# EAGLE board FIDO2AUTH_001 (EAGLE 7.7.0)
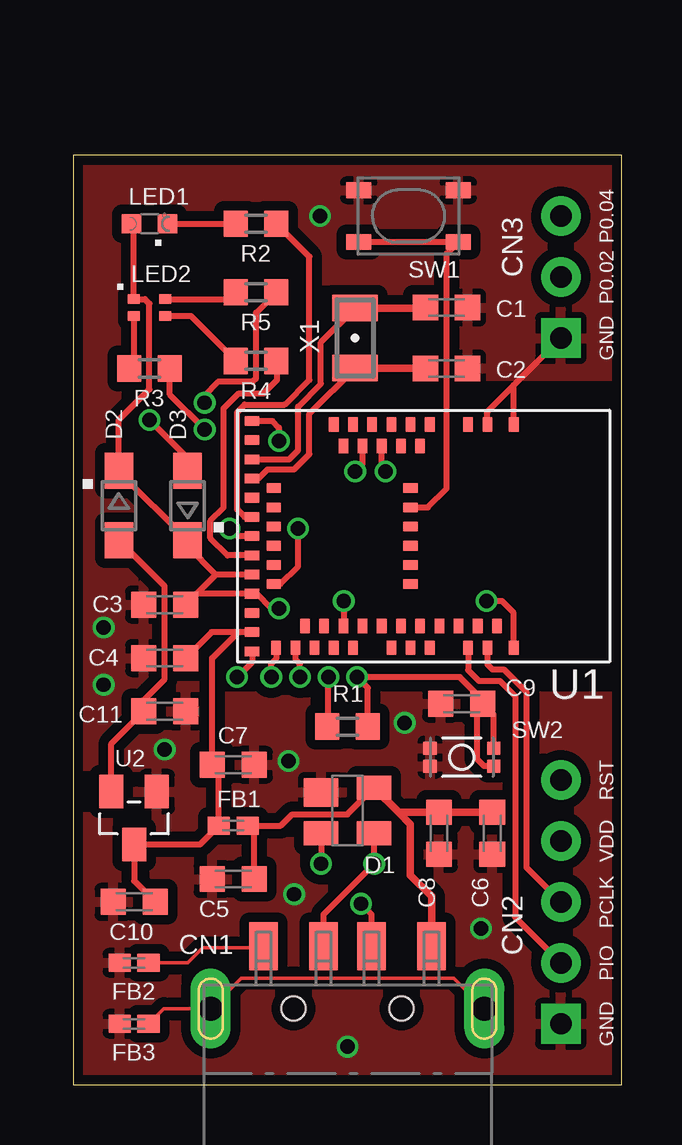
[diagram p0: board, top side]
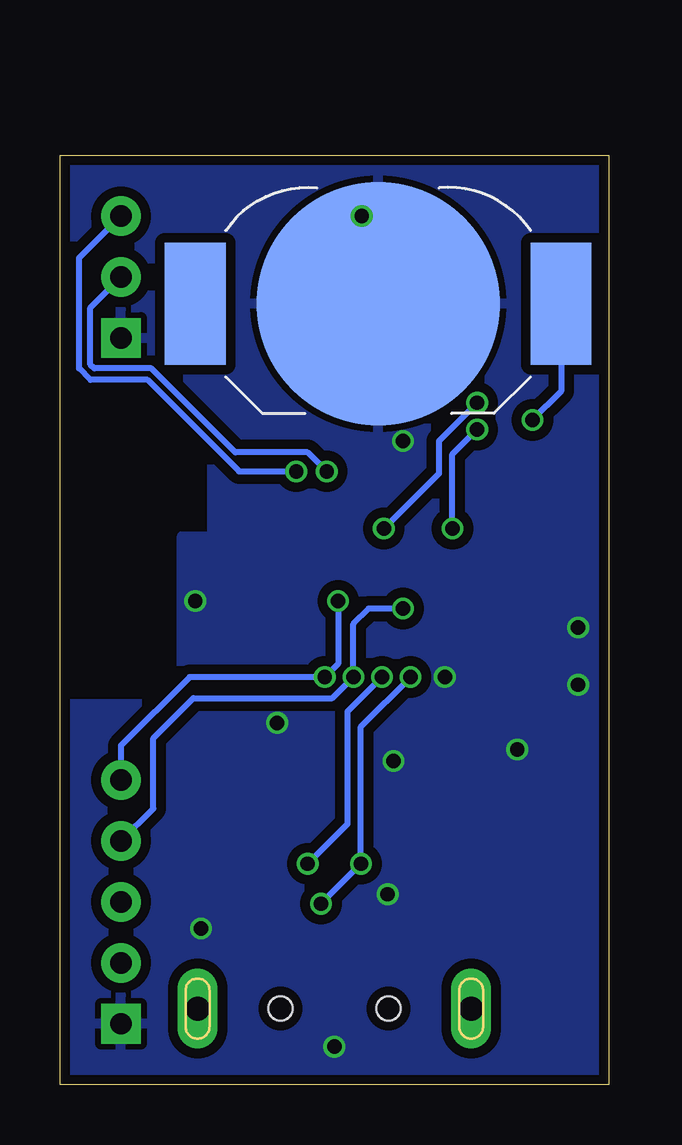
[diagram p1: board, bottom side, seen from below]

Size 22.86 x 38.73 mm. Coordinates in mm from the lower left corner, seen from the top.
Outline: 0,0 22.86,0 22.86,38.73 0,38.73 0,0
Copper layers (1*16): Top 0.035mm / dielectric 1.5mm / Bottom 0.035mm
Design rules "SeeedStudio_2layer_DRU_no_angle_20140221": minimum track width 6mil, minimum drill 12mil, track to track 6mil, track to pad 6mil, pad to pad 6mil, via to via 6mil, smd to smd 0mil, copper to edge 10mil, drill to drill 10mil, minimum pad ring 10mil, minimum via ring 6mil, stop-mask expansion 2mil, vias tented up to drill 100mil, thermal gap 10mil

## Footprints (pad centres in the part's own frame; a part is rotated, then mirrored left to right if it is on the bottom)
BAT-HLD-012-SMT = smd 2.54 x 5.08: +@1 -7.62,0; +@2 7.62,0 | smd 10.16 x 10.16: - 0,0
C0603K = smd 1.05 x 1.08: 1 -0.875,0; 2 0.875,0
TE-1734028 = smd 1.2 x 2: 1 3.5,2.6; 2 1,2.6; 3 -1,2.6; 4 -3.5,2.6 | drill 1 pad 1.676 long: FG1 5.7,0; FG2 -5.7,0 | hole 1: -2.25,0; 2.25,0
HEADER_5PIN = drill 0.889 pad 1.651 square: 1 0,0 | drill 0.889 pad 1.651: 2 2.54,0; 3 5.08,0; 4 7.62,0; 5 10.16,0
HEADER_3PIN = drill 0.889 pad 1.651 square: 1 0,0 | drill 0.889 pad 1.651: 2 2.54,0; 3 5.08,0
SOT143B = smd 1.2 x 1.44: 1 -0.75,-1.1 | smd 1 x 1.44: 2 0.95,-1.1; 3 0.95,1.1; 4 -0.95,1.1
SOD323-W = smd 1.5 x 1.2: A 1.45,0; C -1.45,0
C0402K@1 = smd 0.925 x 0.74: 1 -0.6,0; 2 0.6,0
CHIPLED_0603 = smd 0.8 x 0.8: A -0.75,0; C 0.75,0
APHF1608LSEEQBDZGKC = smd 0.5 x 0.4: 1 -0.65,0.35; 2 -0.65,-0.35; 3 0.65,-0.35; 4 0.65,0.35
R0603 = smd 1 x 1.1: 1 -0.85,0; 2 0.85,0
SKRPACE010 = smd 1.05 x 0.65: 1 -2.075,1.075; 2 2.075,1.075; 3 -2.075,-1.075; 4 2.075,-1.075
SKTADAE010 = smd 0.55 x 0.55: 1 -1.325,0.375; 2 1.325,0.375; 3 -1.325,-0.375; 4 1.325,-0.375
MDBT50Q-P1M = smd 0.6 x 0.4: 1 -4.65,3.75; 2 -4.65,2.65; 3 -4.65,1.85; 4 -4.65,0.25; 5 -3.75,-0.15; 6 -4.65,-0.55; 7 -3.75,-0.95; 8 -4.65,-1.35; 9 -3.75,-1.75; 10 -4.65,-2.15; 11 -3.75,-2.55; 12 -4.65,-2.95; 13 -3.75,-3.35; 14 -4.65,-3.75; 34 4.65,-6.15; 35 4.65,-5.35; 36 3.75,-4.95; 37 4.65,-4.55; 38 3.75,-4.15; 39 4.65,-3.75; 40 3.75,-3.35; 41 4.65,-2.95; 42 3.75,-2.55; 43 3.75,-1.75; 44 4.65,-1.35; 45 3.75,-0.95; 46 4.65,-0.55; 47 3.75,-0.15; 48 4.65,0.25; 49 3.75,0.65; 50 3.75,1.45; 51 4.65,1.85; 52 3.75,2.25; 53 4.65,2.65; 54 3.75,3.05; 55 4.65,3.75 | smd 0.4 x 0.6: 15 -4.8,-7.15; 16 -4,-7.15; 17 -3.2,-7.15; 18 -2.4,-7.15; 19 -2,-6.25; 20 -1.6,-7.15; 21 -1.2,-6.25; 22 -0.8,-7.15; 23 -0.4,-6.25; 24 0,-7.15; 25 0.4,-6.25; 26 0.8,-7.15; 27 1.2,-6.25; 28 1.6,-7.15; 29 2,-6.25; 30 2.4,-7.15; 31 3.2,-7.15; 32 4,-7.15; 33 4.8,-7.15; 56 -2,-0.55; 57 -1.2,-0.55; 58 -0.4,-0.55; 59 0.4,-0.55; 60 1.2,-0.55; 61 2,-0.55
SOT23 = smd 1 x 1.4: 1 -0.95,-1.1; 2 0.95,-1.1; 3 0,1.1
NX3215 = smd 1.1 x 1.9: 1 -1.25,0; 2 1.25,0

## Placement (x,y rotation side)
BAT1  BAT-HLD-012-SMT  [BAT-HLD-012-SMT]  9.6,32.54 180 bottom
C1  12pF  [C0603K]  15.56,32.38 0 top
C2  12pF  [C0603K]  15.56,29.84 0 top
C3  4.7uF  [C0603K]  3.81,20 180 top
C4  4.7uF  [C0603K]  3.81,17.78 180 top
C5  0.01uF  [C0603K]  6.67,8.57 180 top
C6  10uF  [C0603K]  17.46,10.48 270 top
C7  0.1uF  [C0603K]  6.67,13.34 0 top
C8  0.1uF  [C0603K]  15.24,10.48 270 top
C9  0.1uF  [C0603K]  16.19,15.88 180 top
C10  1uF  [C0603K]  2.54,7.62 180 top
C11  1uF  [C0603K]  3.81,15.56 0 top
CN1  TE-1734028  [TE-1734028]  11.43,3.17 0 top
CN2  IF_5PIN_H  [HEADER_5PIN]  20.32,2.54 90 top
CN3  IF_3PIN  [HEADER_3PIN]  20.32,31.11 90 top
D1  PRTR5V0U2X  [SOT143B]  11.43,11.43 270 top
D2  PMEG2005AEA,115  [SOD323-W]  1.91,24.13 270 top
D3  PMEG2005AEA,115  [SOD323-W]  4.76,24.13 90 top
FB1  BLM15AG121SN1D  [C0402K@1]  6.67,10.79 180 top
FB2  BLM15AG121SN1D  [C0402K@1]  2.54,5.08 180 top
FB3  BLM15AG121SN1D  [C0402K@1]  2.54,2.54 180 top
LED1  APHD1608LSURCK  [CHIPLED_0603]  3.17,35.88 0 top
LED2  APHF1608LSEEQBDZGKC  [APHF1608LSEEQBDZGKC]  3.17,32.38 0 top
R1  10k  [R0603]  11.43,14.92 0 top
R2  1.5k  [R0603]  7.62,35.88 180 top
R3  1.2k  [R0603]  3.17,29.84 180 top
R4  2.2k  [R0603]  7.62,30.16 180 top
R5  390  [R0603]  7.62,33.02 180 top
SW1  SKRPACE010  [SKRPACE010]  13.97,36.2 180 top
SW2  SKTADAE010  [SKTADAE010]  16.19,13.65 0 top
U1  MDBT50Q-P1M  [MDBT50Q-P1M]  14.61,22.86 270 top
U2  XC6206P332MR-G  [SOT23]  2.54,11.11 180 top
X1  NX3215SA-32.768K  [NX3215]  11.75,31.11 270 top

## Library data of the parts
BAT1 CN1-CN3 = Connectors
C1-C11 D1-D3 FB1-FB3 LED1 LED2 R1-R5 SW1 SW2 U1 U2 X1 = Parts

## Nets
0V: BAT1.- C1.2 C2.2 C3.2 C4.2 C5.2 C6.2 C7.2 C8.2 C9.2 C10.2 C11.2 CN2.1 CN3.1 D1.1 FB2.2 FB3.2 SW1.3 SW1.4 SW2.1 SW2.3 U1.1 U1.2 U1.15 U1.33 U1.55 U2.1
AIN0: CN3.2 U1.11
AIN1: CN3.3 U1.9
D_N: CN1.2 D1.2 U1.34
D_P: CN1.3 D1.3 U1.35
LED1: R2.1 U1.22
LED2_B: R5.1 U1.29
LED2_G: R4.1 U1.26
LED2_R: R3.1 U1.24
N$2: CN1.4 FB2.1
N$3: CN1.FG1 CN1.FG2 FB3.1
N$4: C11.1 D2.A U2.2
N$5: BAT1.+@1 D3.A
N$8: LED2.2 R3.2
N$9: LED2.3 R4.2
N$10: LED2.4 R5.2
N$11: LED1.C R2.2
RESET: C9.1 CN2.5 R1.2 SW2.2 SW2.4 U1.40
SW1: SW1.1 SW1.2 U1.57
SWDCLK: CN2.3 U1.53
SWDIO: CN2.2 U1.51
VBUS: C5.1 C6.1 C8.1 CN1.1 D1.4 FB1.1
VBUS_NRF: C4.1 C7.1 C10.1 FB1.2 U1.32 U2.3
VDD_NRF: C3.1 CN2.4 D2.C D3.C LED1.A LED2.1 R1.1 U1.28 U1.30
XL1: C1.1 U1.17 X1.1
XL2: C2.1 U1.18 X1.2

## Tracks (layer width: path | path; a pad name or v marks a point on that pad's centre or on a via)
0V  (via drill 0.6)
  Top 0.254: U1.55 18.36,19.67 17.86,20.16 v17.22,20.16 | U1.1 18.36,29.15 | 18.36,29.15 CN3.1 | U1.2 17.25,28.05 18.36,29.15 | U1.15 8.3,27.66 8.57,27.38 v8.57,26.83 | U1.33 7.46,17.61 v6.83,16.99
  other vias: 13.81,15.08 16.99,6.51 10.29,36.2 9.21,7.94 11.43,1.59 8.97,13.49 3.81,13.97 1.27,16.67 1.27,19.05
  pour Bottom (isolate 0.406, rank 3): -1.27,-1.27 24.13,-1.27 24.13,15.88 17.78,15.88 17.78,22.86 16.51,22.86 16.51,26.04 17.78,26.04 17.78,29.84 24.13,29.84 24.13,40.64 -1.27,40.64
  pour Top (isolate 0.406, rank 3): -2.54,41.91 25.4,41.91 25.4,29.53 6.35,29.53 6.35,16.19 25.4,16.19 25.4,-2.54 -2.54,-2.54
AIN0  (via drill 0.6)
  Top 0.254: v11.75,25.56 12.05,25.87 U1.11
  Bottom 0.254: v11.75,25.56 12.54,26.35 15.56,26.35 19.05,29.84 21.43,29.84 21.59,30 21.59,32.38 CN3.2
AIN1  (via drill 0.6)
  Top 0.254: v13.02,25.56 12.86,25.72 U1.9
  Bottom 0.254: CN3.3 21.35,35.16 21.75,34.77 22.07,34.45 22.07,29.84 21.59,29.37 19.21,29.37 15.4,25.56 v13.02,25.56
D_N  (via drill 0.6)
  Top 0.254: CN1.2 12.43,7.1 v11.99,7.54 | v8.26,16.99 8.26,17.54 8.46,17.74 U1.34 | D1.2 v10.33,9.22 v10.32,9.21
  Bottom 0.254: v8.26,16.99 10.32,14.92 v10.32,9.21 v11.99,7.54
D_P  (via drill 0.6)
  Top 0.254: CN1.3 10.43,7.1 v12.54,9.21 v12.53,9.22 D1.3 | v9.45,16.99 9.45,17.54 9.26,17.73 U1.35
  Bottom 0.254: v12.54,9.21 10.87,10.87 10.87,15.56 v9.45,16.99
LED1
  Top 0.254: U1.22 7.14,23.66 6.83,23.97 6.83,28.02 7.14,28.34 8.81,28.34 9.84,29.37 9.84,34.51 R2.1
LED2_B  (via drill 0.6)
  Top 0.254: U1.29 8.64,20.86 9.37,21.59 v9.37,23.18 | v5.48,28.42 5.48,28.73 6.03,29.29 7.46,29.29 7.62,29.45 7.62,32.17 R5.1
  Bottom 0.254: v9.37,23.18 7.06,25.48 7.06,26.83 v5.48,28.42
LED2_G
  Top 0.254: U1.26 6.44,22.06 5.71,22.78 5.71,23.5 6.27,24.05 6.27,28.18 6.91,28.81 7.94,28.81 8.49,29.37 8.49,30.14 R4.1
LED2_R  (via drill 0.6)
  Top 0.254: U1.24 6.83,22.86 v6.51,23.18 | v5.48,27.3 4.03,28.76 R3.1
  Bottom 0.254: v6.51,23.18 6.51,26.27 v5.48,27.3
N$2
  Top 0.152: FB2.1 4.76,5.08 5.4,5.71 7.87,5.71 CN1.4
N$3
  Top 0.152: FB3.1 3.77,3.17 CN1.FG2 7,4.45 15.86,4.45 CN1.FG1
N$4
  Top 0.254: U2.2 1.59,14.21 C11.1 2.94,16.03 3.81,16.91 3.81,20.77 D2.A
N$5  (via drill 0.6)
  Top 0.254: v3.17,27.7 4.76,26.11 D3.A
  Bottom 0.254: BAT1.+@1 1.98,28.89 v3.17,27.7
N$8
  Top 0.254: LED2.2 2.52,30.05 R3.2
N$9
  Top 0.254: LED2.3 4.9,32.03 R4.2
N$10
  Top 0.254: LED2.4 6.49,32.73 R5.2
N$11
  Top 0.254: LED1.C R2.2
RESET  (via drill 0.6)
  Top 0.254: v11.27,20.16 11.27,19.13 U1.40 | C9.1 17.07,16.03 16.11,16.99 v11.83,16.99 12.28,16.53 R1.2 | SW2.2 17.52,15.43 C9.1 | SW2.4 17.12,13.28 16.83,13.57 16.83,15.63 C9.1
  Bottom 0.254: v11.27,20.16 11.27,17.54 v11.83,16.99 17.46,16.99 20.32,14.13 CN2.5
SW1
  Top 0.254: U1.57 14.77,24.06 15.56,24.84 15.56,34.63 SW1.1 SW1.2
SWDCLK
  Top 0.254: CN2.3 18.89,9.05 18.89,16.35 17.94,17.3 17.46,17.3 17.25,17.51 U1.53
SWDIO
  Top 0.254: CN2.2 18.41,6.99 18.41,16.19 17.78,16.83 16.91,16.83 16.45,17.28 U1.51
VBUS
  Top 0.254: D1.4 11.42,11.27 9.13,11.27 8.65,10.79 FB1.1 7.54,10.52 C5.1
  Top 0.305: 13.56,11.35 C8.1 C6.1 | 13.56,11.35 D1.4 | CN1.1 14.93,7.85 14.05,8.73 14.05,10.86 13.56,11.35
VBUS_NRF
  Top 0.254: C10.1 2.54,8.49 U2.3 5.29,10.01 FB1.2 6.07,13.06 C7.1 5.79,17.78 6.87,18.86 U1.32 5.76,18.86 C4.1
VDD_NRF  (via drill 0.6)
  Top 0.254: v8.57,19.84 8.26,19.84 7.64,20.46 U1.30 5.14,20.46 | 5.14,20.46 C3.1 | U1.28 5.94,21.26 | 5.94,21.26 5.14,20.46 | 5.94,21.26 4.76,22.44 D3.C 1.91,25.54 D2.C 1.91,27.7 3.17,28.97 3.17,32.54 2.98,32.73 LED2.1 2.52,35.78 LED1.A | R1.1 10.64,14.98 v10.64,16.99
  Bottom 0.254: v8.57,19.84 10,19.84 10.64,19.21 v10.64,16.99 11.51,16.11 17.3,16.11 18.97,14.45 18.97,11.51 CN2.4
XL1
  Top 0.254: X1.1 10.32,30.94 10.32,29.21 9.37,28.26 9.37,26.43 8.99,26.06 U1.17
  Top 0.305: X1.1 14.66,32.37 C1.1
XL2
  Top 0.254: U1.18 7.72,25.26 8.1,25.64 9.21,25.64 9.84,26.27 9.84,27.96 X1.2
  Top 0.305: X1.2 14.66,29.86 C2.1

## Text on the board
tPlace: P0.04 | P0.02 | GND | RST | VDD | PCLK | PIO | GND